# Altium PCB Board.PcbDoc
Units mil, origin at the board's own origin, x right, y up, seen from the top; angles counter-clockwise.
Board outline 2900 x 1175 mil, 4 copper layers (Top GND, Sig/3V3, Sig/5V, Bottom GND), stack 61.811 mil thick; 28 components, 19 nets, 228 pads, 85 vias.
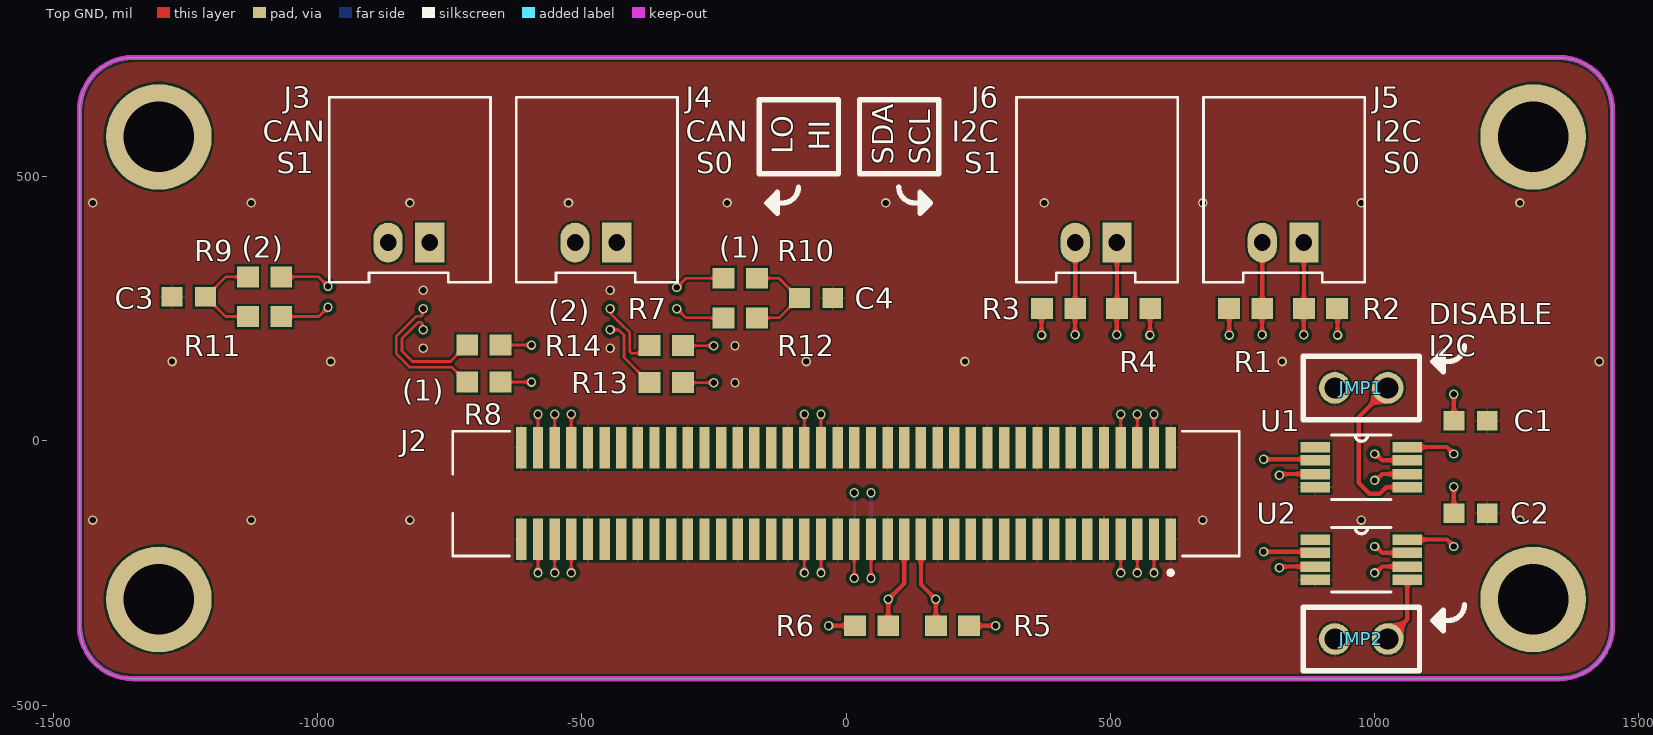
[diagram p0: Top GND view]
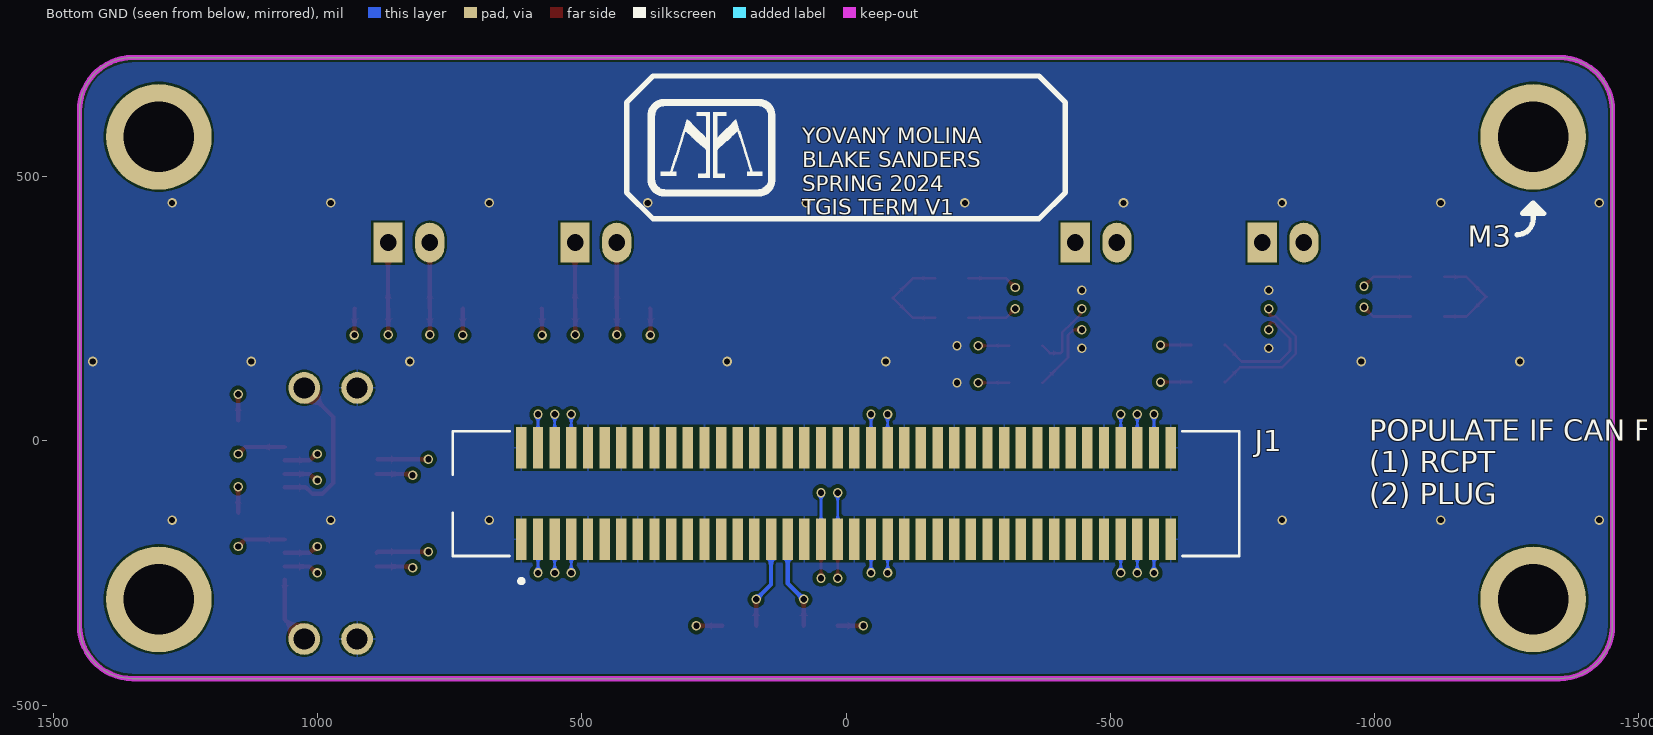
[diagram p1: Bottom GND view, seen from below]
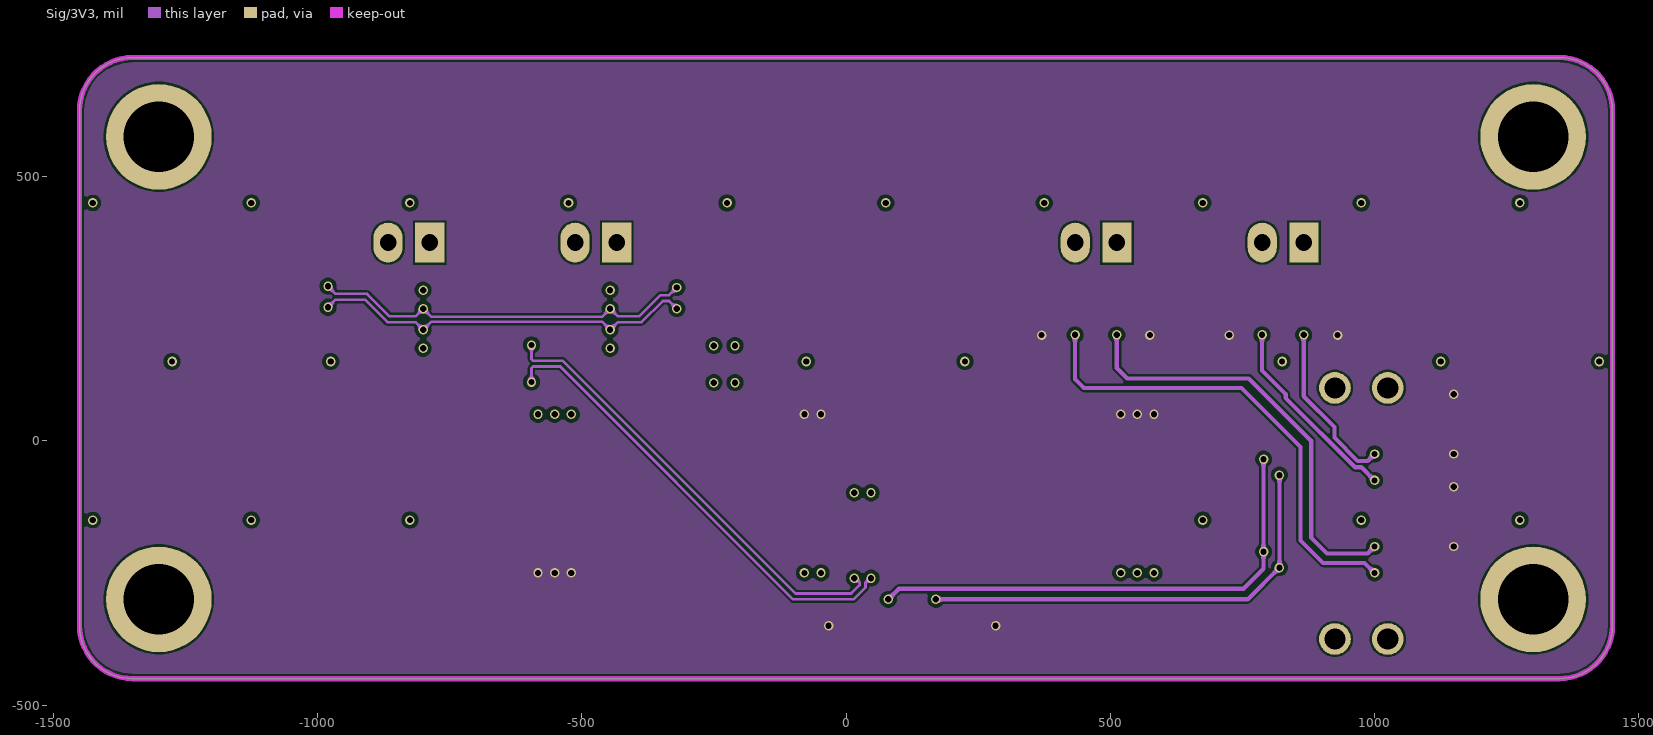
[diagram p2: Sig/3V3]
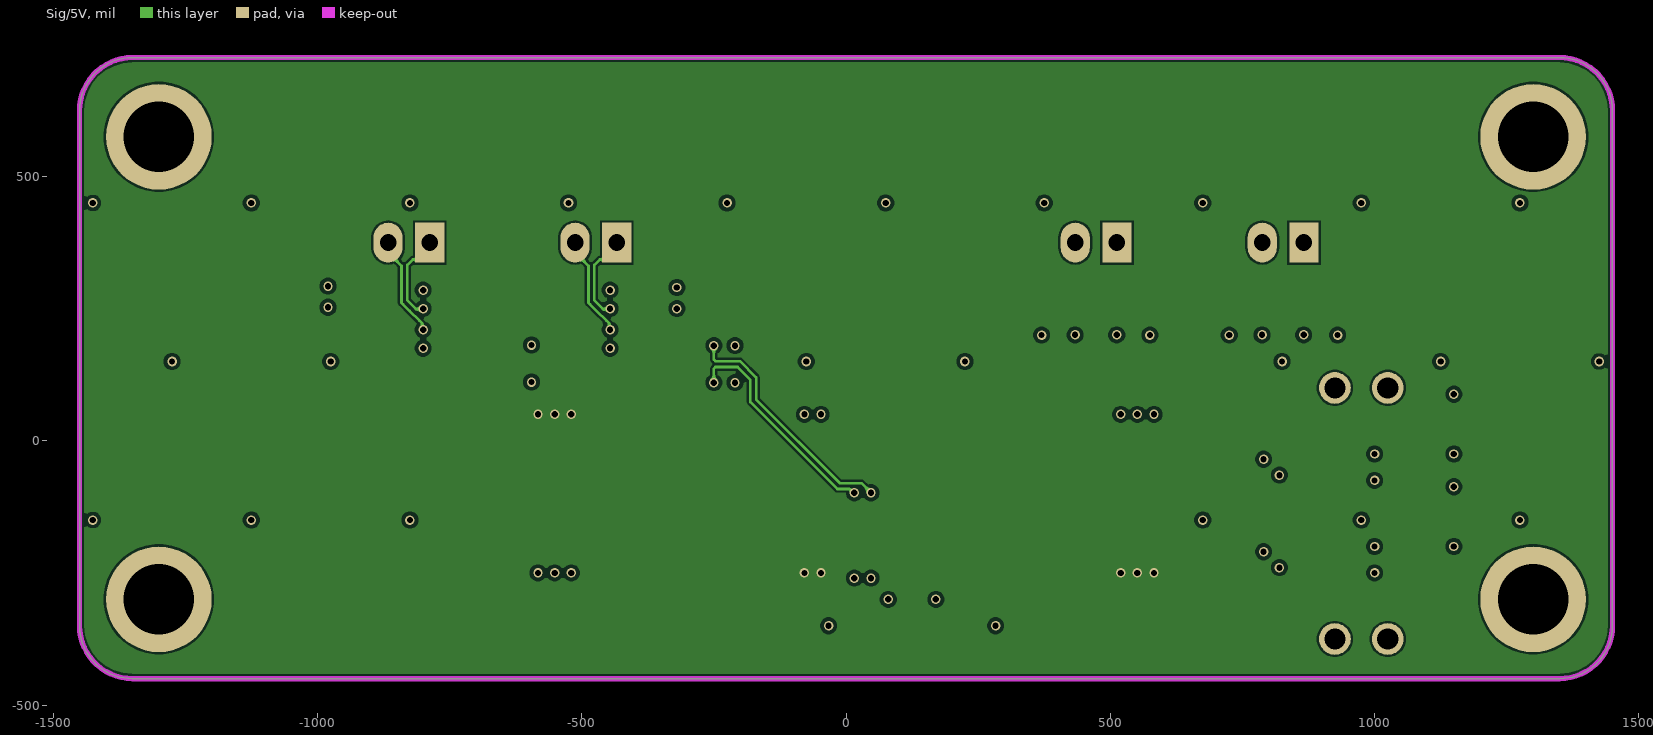
[diagram p3: Sig/5V]

## Layer stack, top to bottom
Top Mask: solder mask 0.5906, Solder Resist, Dk 3.8
Top GND: signal copper 1.378
Dielectric 1: prepreg 7.874, 7628, Dk 4.6
Sig/3V3: signal copper 0.689
Core: core 41.9291, FR-4, Dk 4.5
Sig/5V: signal copper 0.689
Dielectric 2: prepreg 7.874, 7628, Dk 4.6
Bottom GND: signal copper 1.378
Bottom Mask: solder mask 0.5906, Solder Resist, Dk 3.8

## Board outline
-1450,-350 -1450,625 cw(c-1350,625) -1350,725 1350,725 cw(c1350,625) 1450,625 1450,-350 cw(c1350,-350) 1350,-450 -1350,-450 cw(c-1350,-350)

## Design rules (kind name [scope] priority, off if disabled: settings)
BoardOutlineClearance [All] p1: gap=7.87 ignorepadtopadclearanceinfootprint=FALSE
Clearance [All] p1: gap=4 ignorepadtopadclearanceinfootprint=FALSE except(5: Arc-Via Track-Via SMDPad-Via THPad-Via Via-Via Via-Fill Via-Poly Via-Region Via-Text; 9.84: Arc-Hole Track-Hole SMDPad-Hole THPad-Hole Via-Hole Fill-Hole Poly-Hole Region-Hole Text-Hole)
ComponentClearance [All] p1: gap=4 collisioncheckmode=3 verticalgap=4 showdistances=TRUE
DiffPairsRouting "Schematic Differential Pairs Routing_4" [InNetClass('CAN0_RCPT')] p1: maxlimit=6 minlimit=6 mostfreqgap=6 toplayer_minwidth=5 toplayer_maxwidth=10 toplayer_prefwidth=8 midlayer1_minwidth=5 midlayer1_maxwidth=10 midlayer1_prefwidth=8 midlayer2_minwidth=5 midlayer2_maxwidth=10 midlayer2_prefwidth=8 bottomlayer_minwidth=5 bottomlayer_maxwidth=10 bottomlayer_prefwidth=8 maxuncoupledlength=5
DiffPairsRouting "Schematic Differential Pairs Routing_3" [InNetClass('CAN0_PLUG')] p2: maxlimit=6 minlimit=6 mostfreqgap=6 toplayer_minwidth=5 toplayer_maxwidth=10 toplayer_prefwidth=8 midlayer1_minwidth=5 midlayer1_maxwidth=10 midlayer1_prefwidth=8 midlayer2_minwidth=5 midlayer2_maxwidth=10 midlayer2_prefwidth=8 bottomlayer_minwidth=5 bottomlayer_maxwidth=10 bottomlayer_prefwidth=8 maxuncoupledlength=5
DiffPairsRouting "Schematic Differential Pairs Routing" [InNetClass('CAN0')] p3: maxlimit=6 minlimit=6 mostfreqgap=6 toplayer_minwidth=5 toplayer_maxwidth=10 toplayer_prefwidth=8 midlayer1_minwidth=5 midlayer1_maxwidth=10 midlayer1_prefwidth=8 midlayer2_minwidth=5 midlayer2_maxwidth=10 midlayer2_prefwidth=8 bottomlayer_minwidth=5 bottomlayer_maxwidth=10 bottomlayer_prefwidth=8 maxuncoupledlength=5
DiffPairsRouting [All] p4: maxlimit=4 minlimit=4 mostfreqgap=4 toplayer_minwidth=4 toplayer_maxwidth=71497.94 toplayer_prefwidth=4 midlayer1_minwidth=4 midlayer1_maxwidth=71497.94 midlayer1_prefwidth=4 midlayer2_minwidth=4 midlayer2_maxwidth=71497.94 midlayer2_prefwidth=4 bottomlayer_minwidth=4 bottomlayer_maxwidth=71497.94 bottomlayer_prefwidth=4 maxuncoupledlength=500
Height [All] p1: minheight=0 maxheight=71497.94 prefheight=500
HoleSize [All] p1: absolutevalues=TRUE maxlimit=248.03 minlimit=7.87 maxpercent=80.000 minpercent=20.000
HoleToHoleClearance [All] p1: gap=9.84 allowstackedmicrovias=FALSE
MatchedLengths "Schematic Matched Net Lengths_4" [InNetClass('CAN0_PLUG')] p1: tolerance=5 checknetsindiffpair=FALSE checkdiffpairvsdiffpair=TRUE checkxsignals=TRUE checkothers=TRUE
MatchedLengths "Schematic Matched Net Lengths_3" [InNetClass('CAN0_RCPT')] p2: tolerance=5 checknetsindiffpair=FALSE checkdiffpairvsdiffpair=TRUE checkxsignals=TRUE checkothers=TRUE
MatchedLengths "Schematic Matched Net Lengths" [InNetClass('CAN0')] p3: tolerance=5 checknetsindiffpair=FALSE checkdiffpairvsdiffpair=TRUE checkxsignals=TRUE checkothers=TRUE
MinimumAnnularRing [All] p1: minimumring=3
MinimumSolderMaskSliver [All] p1: minsoldermaskwidth=0
PlaneClearance [All] p1: clearance=4
PlaneConnect PlaneConnectPowerPads [InPadClass('PowerPads')] p1: planeconnectstyle=Direct reliefexpansion=20 reliefentries=4 reliefconductorwidth=10 reliefairgap=10
PlaneConnect [All] p2: pad.planeconnectstyle=Relief pad.reliefexpansion=11.81 pad.reliefentries=4 pad.reliefconductorwidth=4 pad.reliefairgap=4 via.planeconnectstyle=Direct via.reliefexpansion=11.81 via.reliefentries=4 via.reliefconductorwidth=5 via.reliefairgap=5
PolygonConnect PolygonConnectPowerPads [All vs (InPadClass('PowerPads'))] p1: connectstyle=Direct reliefconductorwidth=10 reliefentries=4 polygonreliefangle="90 Angle" airgapwidth=10
PolygonConnect [All] p2: thpad.connectstyle=Relief thpad.reliefconductorwidth=4 thpad.reliefentries=4 thpad.polygonreliefangle="90 Angle" thpad.airgapwidth=4 smdpad.connectstyle=Relief smdpad.reliefconductorwidth=4 smdpad.reliefentries=4 smdpad.polygonreliefangle="90 Angle" smdpad.airgapwidth=4 via.connectstyle=Direct via.reliefconductorwidth=5 via.reliefentries=4 via.polygonreliefangle="90 Angle" via.airgapwidth=5
RoutingVias [All] p1: holewidth=7.87 width=17.72 viastyle="Through Hole" minholewidth=7.87 minwidth=17.72 maxholewidth=248.03 maxwidth=257.87
SilkToSilkClearance [All] p1: silktosilkclearance=0
SilkToSolderMaskClearance [IsPad] p1: minsilkscreentomaskgap=4 clearancetoexposedcopper=TRUE
SolderMaskExpansion [All] p1: expansion=2.95 istentingtop=FALSE
Width [All] p1: maxlimit=71497.94 minlimit=4 preferedwidth=4
20 further rules are at their usual default settings.

## Classes and differential pairs
net class CAN0_RCPT: CAN0_RCPT_N CAN0_RCPT_P
net class CAN0_PLUG: CAN0_PLUG_N CAN0_PLUG_P
differential pair class CAN0_LINES: CAN0 CAN0_PLUG CAN0_RCPT
net class CAN0: CAN0_N CAN0_P
differential pair CAN0_RCPT: +CAN0_RCPT_P -CAN0_RCPT_N
differential pair CAN0_PLUG: +CAN0_PLUG_P -CAN0_PLUG_N
differential pair CAN0: +CAN0_P -CAN0_N

## Components (designator, comment, footprint, x,y, rotation, side; value= is the part's Value field where it differs from the comment)
C1 "100nF" CAPC0603 1181.5,38 r180 top
C2 "100nF" CAPC0603 1181.5,-137 r180 top
C3 "4.7nF" CAPC0603 -1243.5,272.5 r180 top
C4 "4.7nF" CAPC0603 -56.5,270 r0 top
J1 "10144517-081802LF" AMPHENOL_10144517-081802LF 0,-100 r0 bottom
J2 "10144518-083802LF" AMPHENOL_10144518-083802LF 0,-100 r180 top
J3 "0353630260" MOLEX-HDR-1X2-SHERLOCK-HORZ -787.5,375 r0 top
J4 "0353630260" MOLEX-HDR-1X2-SHERLOCK-HORZ -433.76,375 r0 top
J5 "0353630260" MOLEX-HDR-1X2-SHERLOCK-HORZ 866.24,375 r0 top
J6 "0353630260" MOLEX-HDR-1X2-SHERLOCK-HORZ 512.5,375 r0 top
JMP1 "2 Pin Header" 2PinJumper 1025,100 r180 top
JMP2 "2 Pin Header" 2PinJumper 1025,-375 r180 top
R1 "DNP" RES0603 756,250 r180 top
R2 "DNP" RES0603 897.74,250 r0 top
R3 "DNP" RES0603 402.26,250 r180 top
R4 "DNP" RES0603 544,250 r0 top
R5 "DNP" RES0603 201.5,-350 r0 top
R6 "DNP" RES0603 48.5,-350 r180 top
R7 "0R" RES0603 -340,180 r0 top
R8 "0R" RES0603 -685.04,111.1 r180 top
R9 "60.4R" RES0603 -1100,310 r0 top
R10 "60.4R" RES0603 -200,307.5 r180 top
R11 "60.4R" RES0603 -1100,235 r0 top
R12 "60.4R" RES0603 -200,232.5 r180 top
R13 "0R" RES0603 -340,110 r0 top
R14 "0R" RES0603 -685.04,181.1 r180 top
U1 "PCA9515ADP" SOP65P490X110-8N 975,-50 r0 top
U2 "PCA9515ADP" SOP65P490X110-8N 975,-225 r0 top

## Footprints (in the part's own frame and the unit in brackets; to place one, negate y for a bottom-side part, rotate by r counter-clockwise, add the part's x,y. Pads: shape width x height; smd on the part's side, far side on the other; paste and mask are expansions set on the pad)
2PinJumper [mil]
  round 60 hole 40: 1(0,0) 2(100,0)
  silkscreen extent -60,-60 160,60, body extent -52,-50 152,50, height 339
AMPHENOL_10144517-081802LF [mm]
  rect 0.5x2 smd: 1(15.6,2.2) 2(15.6,-2.2) 3(14.8,2.2) 4(14.8,-2.2) 5(14,2.2) 6(14,-2.2) 7(13.2,2.2) 8(13.2,-2.2) 9(12.4,2.2) 10(12.4,-2.2) 11(11.6,2.2) 12(11.6,-2.2) 13(10.8,2.2) 14(10.8,-2.2) 15(10,2.2) 16(10,-2.2) 17(9.2,2.2) 18(9.2,-2.2) 19(8.4,2.2) 20(8.4,-2.2) 21(7.6,2.2) 22(7.6,-2.2) 23(6.8,2.2) 24(6.8,-2.2) 25(6,2.2) 26(6,-2.2) 27(5.2,2.2) 28(5.2,-2.2) 29(4.4,2.2) 30(4.4,-2.2) 31(3.6,2.2) 32(3.6,-2.2) 33(2.8,2.2) 34(2.8,-2.2) 35(2,2.2) 36(2,-2.2) 37(1.2,2.2) 38(1.2,-2.2) 39(0.4,2.2) 40(0.4,-2.2) 41(-0.4,2.2) 42(-0.4,-2.2) 43(-1.2,2.2) 44(-1.2,-2.2) 45(-2,2.2) 46(-2,-2.2) 47(-2.8,2.2) 48(-2.8,-2.2) 49(-3.6,2.2) 50(-3.6,-2.2) 51(-4.4,2.2) 52(-4.4,-2.2) 53(-5.2,2.2) 54(-5.2,-2.2) 55(-6,2.2) 56(-6,-2.2) 57(-6.8,2.2) 58(-6.8,-2.2) 59(-7.6,2.2) 60(-7.6,-2.2) 61(-8.4,2.2) 62(-8.4,-2.2) 63(-9.2,2.2) 64(-9.2,-2.2) 65(-10,2.2) 66(-10,-2.2) 67(-10.8,2.2) 68(-10.8,-2.2) 69(-11.6,2.2) 70(-11.6,-2.2) 71(-12.4,2.2) 72(-12.4,-2.2) 73(-13.2,2.2) 74(-13.2,-2.2) 75(-14,2.2) 76(-14,-2.2) 77(-14.8,2.2) 78(-14.8,-2.2) 79(-15.6,2.2) 80(-15.6,-2.2)
  silkscreen extent -18.9,-3 18.9,4.3, body extent -18.9,-3 18.9,3, height 3.66
AMPHENOL_10144518-083802LF [mm]
  rect 0.5x2 smd paste+0: 1(-15.6,2.2) 2(-15.6,-2.2) 3(-14.8,2.2) 4(-14.8,-2.2) 5(-14,2.2) 6(-14,-2.2) 7(-13.2,2.2) 8(-13.2,-2.2) 9(-12.4,2.2) 10(-12.4,-2.2) 11(-11.6,2.2) 12(-11.6,-2.2) 13(-10.8,2.2) 14(-10.8,-2.2) 15(-10,2.2) 16(-10,-2.2) 17(-9.2,2.2) 18(-9.2,-2.2) 19(-8.4,2.2) 20(-8.4,-2.2) 21(-7.6,2.2) 22(-7.6,-2.2) 23(-6.8,2.2) 24(-6.8,-2.2) 25(-6,2.2) 26(-6,-2.2) 27(-5.2,2.2) 28(-5.2,-2.2) 29(-4.4,2.2) 30(-4.4,-2.2) 31(-3.6,2.2) 32(-3.6,-2.2) 33(-2.8,2.2) 34(-2.8,-2.2) 35(-2,2.2) 36(-2,-2.2) 37(-1.2,2.2) 38(-1.2,-2.2) 39(-0.4,2.2) 40(-0.4,-2.2) 41(0.4,2.2) 42(0.4,-2.2) 43(1.2,2.2) 44(1.2,-2.2) 45(2,2.2) 46(2,-2.2) 47(2.8,2.2) 48(2.8,-2.2) 49(3.6,2.2) 50(3.6,-2.2) 51(4.4,2.2) 52(4.4,-2.2) 53(5.2,2.2) 54(5.2,-2.2) 55(6,2.2) 56(6,-2.2) 57(6.8,2.2) 58(6.8,-2.2) 59(7.6,2.2) 60(7.6,-2.2) 61(8.4,2.2) 62(8.4,-2.2) 63(9.2,2.2) 64(9.2,-2.2) 65(10,2.2) 66(10,-2.2) 67(10.8,2.2) 68(10.8,-2.2) 69(11.6,2.2) 70(11.6,-2.2) 71(12.4,2.2) 72(12.4,-2.2) 73(13.2,2.2) 74(13.2,-2.2) 75(14,2.2) 76(14,-2.2) 77(14.8,2.2) 78(14.8,-2.2) 79(15.6,2.2) 80(15.6,-2.2)
  silkscreen extent -18.9,-3 18.9,3.9, body extent -18.9,-3 18.9,3, height 6.65
CAPC0603 [mm] "Chip Capacitor, 2-Leads, Body 1.60x0.80mm, IPC Medium Density"
  rect 1x0.95 smd: 1(-0.8,0) 2(0.8,0)
  body extent -0.88,-0.48 0.87,0.48, height 0.8
MOLEX-HDR-1X2-SHERLOCK-HORZ [mm]
  rect 1.397x1.905 hole 0.8: 1(0,0)
  oval 1.397x1.905 hole 0.8: 2(-2,0)
  silkscreen extent -4.83,-1.91 2.92,6.98, body extent -4.83,-1.91 2.87,8.59, height 5.54
RES0603 [mm] "Chip Resistor, 2-Leads, Body 1.60x0.80mm, IPC Medium Density"
  rect 1.05x1 smd: 1(-0.8,0) 2(0.8,0)
  body extent -0.88,-0.48 0.87,0.47, height 0.8
SOP65P490X110-8N [mil]
  rect 56x20 smd: 1(-87,38) 2(-87,13) 3(-87,-13) 4(-87,-38) 5(87,-38) 6(87,-13) 7(87,13) 8(87,38)
  silkscreen extent -56,-61 56,61, body extent -96,-59 96,59, height 38

## Part data
C1 C2: library part CC0603KRX7R7BB104, "Ceramic Capacitor, Multilayer, Cera", Capacitor Type=Ceramic, Case/Package=0603, Manufacturer=Yageo, Max Operating Temperature=125°C, Min Operating Temperature=-55°C, Package Shape=Rectangular, Package Style=SMTMeter, Rated DC Voltage (URdc)=16V, Supplier Part Number 1=311-1088-1-ND, Temperature Characteristics Code=X7R, Tolerance  (fill in as +-)=10%, Category="Ceramic Capacitors", ComponentLink1Description=https://datasheet.ciiva.com:443/pdf, ComponentLink1URL=https://datasheet.ciiva.com:443/pdf, ComponentLink2Description=https://datasheet.ciiva.com/11786/0, ComponentLink2URL=https://datasheet.ciiva.com/11786/0, ComponentLink3Description=https://datasheet.ciiva.com/8033/70, ComponentLink3URL=https://datasheet.ciiva.com/8033/70, ComponentLink4Description=https://datasheet.ciiva.com/7978/14, ComponentLink4URL=https://datasheet.ciiva.com/7978/14, ComponentLink5Description=https://datasheet.ciiva.com/28450/1, ComponentLink5URL=https://datasheet.ciiva.com/28450/1, ComponentLink6Description=https://datasheet.ciiva.com/46430/1, ComponentLink6URL=https://datasheet.ciiva.com/46430/1, ComponentLink7Description=https://datasheet.ciiva.com/144/mlc, ComponentLink7URL=https://datasheet.ciiva.com/144/mlc, ComponentLink8Description=https://datasheet.ciiva.com/144/mlc, ComponentLink8URL=https://datasheet.ciiva.com/144/mlc, ComponentLink9Description=https://datasheet.ciiva.com/144/mlc, ComponentLink9URL=https://datasheet.ciiva.com/144/mlc, ComponentLink10Description=https://datasheet.ciiva.com/8033/17, ComponentLink10URL=https://datasheet.ciiva.com/8033/17, ComponentLink11Description=https://datasheet.ciiva.com/13395/u, ComponentLink11URL=https://datasheet.ciiva.com/13395/u, ComponentLink12Description=https://datasheet.ciiva.com/11464/u, ComponentLink12URL=https://datasheet.ciiva.com/11464/u, ComponentLink13Description=https://datasheet.ciiva.com/15165/g, ComponentLink13URL=https://datasheet.ciiva.com/15165/g, ComponentLink14Description=https://datasheet.ciiva.com:443/pdfs/VipMasterIC/IC/YAGO/YAGO-S-A0003557223, ComponentLink14URL=https://datasheet.ciiva.com:443/pdfs/VipMasterIC/IC/YAGO/YAGO-S-A0003557223, ComponentLink15Description=https://datasheet.ciiva.com/11786/0900766b80d84f1d-11786077.pdf?src-supplie, ComponentLink15URL=https://datasheet.ciiva.com/11786/0900766b80d84f1d-11786077.pdf?src-supplie, ComponentLink16Description=https://datasheet.ciiva.com/8033/70765-8033799.pdf?src-supplier=Element14, ComponentLink16URL=https://datasheet.ciiva.com/8033/70765-8033799.pdf?src-supplier=Element14, ComponentLink17Description=https://datasheet.ciiva.com/7978/1489800-7978141.pdf?src-supplier=Element14, ComponentLink17URL=https://datasheet.ciiva.com/7978/1489800-7978141.pdf?src-supplier=Element14, ComponentLink18URL=https://datasheet.ciiva.com/28450/1489800-28450552.pdf?src-supplier=Element, Dielectric Material=Ceramic, Height=0.8mm, JESD-609 Code=e3, Length=1.6mm, Manufacturer Part Number=CC0603KRX7R7BB104, Mounting Technology="Surface Mount", Multilayer=Yes, Packaging="Tape and Reel", Part Number=CC0603KRX7R7BB104, Pins=2, Pricing 1="1=0.1, 10=0.042, 50=0.0238, 100=0.0", Reach SVHC Compliant=Yes, RoHS=Yes, RoHS Compliant=Yes, Stock 1=11347706, Supplier 1=Digikey, Terminal Finish=Nickel, Termination=Wraparound, Tolerance (fill in as +-)=10%, Width=0.8mm
C3 C4: library part CC0603JPX7R9BB472, "Ceramic Capacitor, Multilayer, Cera", Capacitor Type=Ceramic, Case/Package=0603, Manufacturer=Yageo, Max Operating Temperature=125°C, Min Operating Temperature=-55°C, Package Shape=Rectangular, Package Style=SMTMeter, Rated DC Voltage (URdc)=50V, Supplier Part Number 1=13-CC0603JPX7R9BB472CT-ND, Temperature Characteristics Code=X7R, Tolerance  (fill in as +-)=5%, Category="Ceramic Capacitors", ComponentLink1Description=https://datasheet.ciiva.com:443/pdf, ComponentLink1URL=https://datasheet.ciiva.com:443/pdf, ComponentLink2Description=http://www.mouser.com/ds/2/447/Yage, ComponentLink2URL=http://www.mouser.com/ds/2/447/Yage, Dielectric Material=Ceramic, Height=0.8mm, JESD-609 Code=e3, Length=1.6mm, Manufacturer Part Number=CC0603JPX7R9BB472, Mounting Technology="Surface Mount", Multilayer=Yes, Packaging="Tape and Reel", Part Number=CC0603JPX7R9BB472, Pins=2, Pricing 1="1=0.1, 10=0.069, 50=0.0398, 100=0.0", Reach SVHC Compliant=Yes, RoHS=Yes, RoHS Compliant=Yes, Stock 1=59880, Supplier 1=Digikey, Terminal Finish=Nickel, Termination=Wraparound, Tolerance (fill in as +-)=5%, Width=0.8mm
J1: "CONN RCPT 1 80POS SMD GOLD", Supplier Part Number 1=609-5437-1-ND, Supplier 1=Digikey, System=Connector
J2: "CONN PLUG 3 80POS SMD GOLD", Supplier Part Number 1=609-5455-1-ND, Supplier 1=Digikey, System=Connector
J3 J4 J5 J6: library part SHERLOCK-1x2-RA, "Header, Molex, 2mm Pitch Sherlock Header, Single Row, Horizontal, 2 Circuits, Length 3.3mm,  0353630260", Manufacturer="Molex Inc", Supplier Part Number 1=WM18931-ND, Manufacturer Part Number=0353630260, Supplier 1=Digi-Key
JMP1 JMP2: library part Jumper_2Pin, "2 Position Jumper"
R1 R2 R3 R4 R5 R6: library part Resistor_DNP, "(DO NOT PLACE) Resistor"
R7 R8 R13 R14: library part RC0603FR-070RL, "Fixed Resistor, Metal Glaze/thick F", Case/Package=0603, Max Operating Temperature=155°C, Min Operating Temperature=-55°C, Package Shape=Rectangular, Power=100mW, Rated Temperature=70°C, Resistor Type="FIXED RESISTOR", Category="Chip SMD Resistors", ComponentLink1Description=https://datasheet.ciiva.com:443/pdf, ComponentLink1URL=https://datasheet.ciiva.com:443/pdf, ComponentLink2Description=https://datasheet.ciiva.com/11808/0, ComponentLink2URL=https://datasheet.ciiva.com/11808/0, ComponentLink3Description=https://datasheet.ciiva.com/5684/44, ComponentLink3URL=https://datasheet.ciiva.com/5684/44, ComponentLink4Description=https://datasheet.ciiva.com/7983/44, ComponentLink4URL=https://datasheet.ciiva.com/7983/44, ComponentLink5Description=https://datasheet.ciiva.com/22643/1, ComponentLink5URL=https://datasheet.ciiva.com/22643/1, ComponentLink6Description=https://datasheet.ciiva.com/46382/4, ComponentLink6URL=https://datasheet.ciiva.com/46382/4, ComponentLink7Description=https://datasheet.ciiva.com/29721/p, ComponentLink7URL=https://datasheet.ciiva.com/29721/p, ComponentLink8Description=https://datasheet.ciiva.com/29721/p, ComponentLink8URL=https://datasheet.ciiva.com/29721/p, ComponentLink9Description=https://datasheet.ciiva.com/5558/rc, ComponentLink9URL=https://datasheet.ciiva.com/5558/rc, JESD-609 Code=e3, Mounting Technology="Surface Mount", Packaging="Tape and Reel", Part Number=RC0603FR-070RL, Pins=2, Pricing 1="5000=0.0015, 50000=0.0014, 125000=0", Reach SVHC Compliant=Yes, RoHS Compliant=Yes, Stock 1=2895000, Technology="METAL GLAZE/THICK FILM", Terminal Finish=Nickel, Termination=Wraparound
R9 R10 R11 R12: library part RC0603FR-0760R4L, "Fixed Resistor, Metal Glaze/thick F", Case/Package=0603, Manufacturer=Yageo, Max Operating Temperature=155°C, Min Operating Temperature=-55°C, Package Height=0.45mm, Package Length=1.6mm, Package Shape=Rectangular, Package Style=SMTMeter, Package Width=0.8mm, Power=100mW, Rated Temperature=70°C, Resistor Type="FIXED RESISTOR", Supplier Part Number 1=311-60.4HRCT-ND, Temperature Coefficient=100ppm/°C, Tolerance=1%, Working Voltage=75V, Additional Feature="LASER TRIMMABLE", Category="Chip SMD Resistors", ComponentLink1Description=https://datasheet.ciiva.com:443/pdf, ComponentLink1URL=https://datasheet.ciiva.com:443/pdf, ComponentLink2Description=https://datasheet.ciiva.com/12558/r, ComponentLink2URL=https://datasheet.ciiva.com/12558/r, Construction=Chip, JESD-609 Code=e3, Manufacturer Part Number=RC0603FR-0760R4L, Mounting Technology="Surface Mount", Packaging="Tape and Reel", Part Number=RC0603FR-0760R4L, Pins=2, Pricing 1="1=0.1, 10=0.019, 50=0.0112, 100=0.0", Reach SVHC Compliant=Yes, RoHS=Yes, RoHS Compliant=Yes, Stock 1=181136, Supplier 1=Digikey, Technology="METAL GLAZE/THICK FILM", Terminal Finish=Nickel, Termination=Wraparound
U1 U2: "IC REDRIVER I2C 2CH 8TSSOP", Supplier Part Number 1=568-1032-1-ND, Supplier 1=Digikey

## Free pads (board coordinates)
  round 200 hole 133.86: M3(-1300,-300) M3(-1300,575) M3(1300,-300) M3(1300,575)

## Via types
v1: diameter 17.81, hole 11.81, Top GND to Bottom GND, tented top, 62 vias
v2: diameter 18, hole 12, Top GND to Bottom GND, 23 vias

## Nets (pads, with @x,y where several pads share a name; then routed paths per layer and width w, separated by ;. In a path a pad name is that pad's centre, name@x,y a point inside that pad or via, vN(x,y) a via of type N, cw(c..) or ccw(c..) an arc to the next point about the centre after c; other vN are vias at no path point)
+3V3: C1.2 C2.2 J1.4 J1.6 J1.8 J1.44 J1.46 J1.73 J1.75 J1.77 J2.4 J2.6 J2.8 J2.44 J2.46 J2.73 J2.75 J2.77 R1.2 R2.2 R3.2 R4.2 R5.2 R6.2 U1.8 U2.8 | length 1598.9
  Top GND w5: v1(-582.68,-250) J2.77 ; v1(-551.18,-250) J2.75 ; v1(-519.68,-250) J2.73 ; J2.46 v1(-78.74,50) ; J2.44 v1(-47.24,50) ; J2.8 v1(519.69,50) ; J2.6 v1(551.18,50) ; J2.4 v1(582.68,50)
  Top GND w8: v1(-32.99,-350) R6.2@16.24,-350 ; R5.2@233.76,-350 v1(282.99,-350) ; v1(370,200) 370,249.23 R3.2 ; v1(575,200) 575,249.51 R4.2 ; R1.2 725,249.51 v1(725,200) ; R2.2 930,249.23 v1(930,200) ; U2.8 1137,-187 v1(1150,-200) ; U1.8 1137,-12 v1(1150,-25) ; C2.2@1150,-136.23 v1(1150,-87) ; C1.2@1150,38.77 v1(1150,88)
  Bottom GND w5: v1(-582.68,-250) J1.77 ; v1(-551.18,-250) J1.75 ; v1(-519.68,-250) J1.73 ; J1.46 v1(-78.74,50) ; J1.44 v1(-47.24,50) ; J1.8 v1(519.69,50) ; J1.6 v1(551.18,50) ; J1.4 v1(582.68,50)
+5V: J1.3 J1.5 J1.7 J1.43 J1.45 J1.74 J1.76 J1.78 J2.3 J2.5 J2.7 J2.43 J2.45 J2.74 J2.76 J2.78 | length 1014.2
  Top GND w5: J2.78 v1(-582.68,50) ; J2.76 v1(-551.18,50) ; J2.74 v1(-519.68,50) ; v1(-78.74,-250) J2.45 ; v1(-47.24,-250) J2.43 ; v1(519.69,-250) J2.7 ; v1(551.18,-250) J2.5 ; v1(582.68,-250) J2.3
  Bottom GND w5: J1.78 v1(-582.68,50) ; J1.76 v1(-551.18,50) ; J1.74 v1(-519.68,50) ; v1(-78.74,-250) J1.45 ; v1(-47.24,-250) J1.43 ; v1(519.69,-250) J1.7 ; v1(551.18,-250) J1.5 ; v1(582.68,-250) J1.3
CAN0_N: J3.2 J4.2 R11.2 R12.2 R13.1 R14.2 | length 1681.1
  Top GND w5: R11.2 -997.5,235 v1(-980,252.5) ; v1(-800,210) -801.56,211.56 -801.56,221.57 -804.49,224.5 -808.63,224.5 -840,193.13 -840,170 -820,150 -748.62,150 -717.52,181.1 R14.2 ; v1(-446.26,210) -430,210 -420,200 -420,157.52 -390.32,127.84 -372.48,110 R13.1 ; v1(-320,250) -302.5,232.5 R12.2
  Sig/3V3 w5: v1(-980,252.5) -965.5,267 -910.31,267 -867.81,224.5 -814.5,224.5 v1(-800,210) -784.5,225.5 -461.76,225.5 v1(-446.26,210) -431.76,224.5 -386.63,224.5 -346.63,264.5 -334.5,264.5 v1(-320,250)
  Sig/5V w5: J3.2 -866.24,356.24 -841,331 -841,261.01 -837.78,257.79 -825.93,245.93 -807.27,227.28 -801.56,221.57 -801.56,211.56 v1(-800,210) ; J4.2 -512.5,356.24 -487.26,331 -487.26,261.01 -484.04,257.79 -472.19,245.93 -453.53,227.28 -447.82,221.57 -447.82,211.56 v1(-446.26,210)
CAN0_P: J3.1 J4.1 R7.1 R8.2 R9.2 R10.2 | length 1668.7
  Top GND w5: R9.2 -997.5,310 v1(-980,292.5) ; v1(-800,250) -801.56,248.44 -801.56,238.43 -804.49,235.5 -813.19,235.5 -851,197.69 -851,165.44 -824.56,139 -745.42,139 -717.52,111.1 R8.2 ; v1(-446.26,250) -443.93,247.67 -443.93,239.2 -426.6,221.88 -426.32,221.88 -409,204.56 -409,168.75 -406.07,165.82 -385.68,165.82 R7.1 ; v1(-320,290) -302.5,307.5 R10.2
  Sig/3V3 w5: v1(-980,292.5) -965.5,278 -905.75,278 -863.25,235.5 -814.5,235.5 v1(-800,250) -784.5,234.5 -461.76,234.5 v1(-446.26,250) -431.76,235.5 -391.19,235.5 -351.19,275.5 -334.5,275.5 v1(-320,290)
  Sig/5V w5: v1(-800,250) -801.01,248.99 -813.43,248.99 -830,265.56 -830,332.5 -819.57,342.93 -812.5,342.93 -787.5,367.93 J3.1 ; v1(-446.26,250) -447.27,248.99 -459.69,248.99 -476.26,265.56 -476.26,332.5 -465.83,342.93 -458.76,342.93 -433.76,367.93 J4.1
CAN0_PLUG_N: J1.39 R13.2 | length 563.4
  Top GND w5: R13.2 v1(-250,110)
  Sig/5V w5: v1(-250,110) -250,136.57 -247.07,139.5 -205.06,139.5 -181,115.44 -181,73.43 -16.39,-91.18 6.46,-91.18 13.71,-98.43 v1(15.75,-98.43)
  Bottom GND w5: J1.39 v1(15.75,-98.43)
CAN0_PLUG_P: J1.37 R7.2 | length 599.4
  Top GND w5: R7.2 v1(-250,180)
  Sig/5V w5: v1(-250,180) -250,153.43 -247.07,150.5 -200.5,150.5 -170,120 -170,77.99 -11.84,-80.18 29,-80.18 v1(47.24,-98.43)
  Bottom GND w5: J1.37 v1(47.24,-98.43)
CAN0_RCPT_N: J2.39 R14.1 | length 987.8
  Top GND w5: R14.1 v1(-595.04,181.1) ; v1(15.75,-259.84) J2.39
  Sig/3V3 w5: v1(-595.04,181.1) -595.04,154.53 -592.11,151.6 -536.05,151.6 -529.6,145.16 -95.44,-289 9.72,-289 26,-272.73 26,-268.59 17.25,-259.84 v1(15.75,-259.84)
CAN0_RCPT_P: J2.37 R8.1 | length 1006
  Top GND w5: R8.1 v1(-595.04,111.1) ; v1(47.24,-259.84) J2.37
  Sig/3V3 w5: v1(-595.04,111.1) -595.04,137.67 -592.11,140.6 -540.6,140.6 -100,-300 14.28,-300 37,-277.29 37,-268.59 45.74,-259.84 v1(47.24,-259.84)
GND: C1.1 C2.1 C3.2 C4.2 J1.1 J1.2 J1.9 J1.10 J1.13 J1.14 J1.15 J1.17 J1.18 J1.23 J1.24 J1.29 J1.30 J1.35 J1.36 J1.41 J1.42 J1.47 J1.48 J1.53 J1.54 J1.59 J1.60 J1.65 J1.66 J1.71 J1.72 J1.79 J1.80 J2.1 J2.2 J2.9 J2.10 J2.13 J2.14 J2.17 J2.18 J2.23 J2.24 J2.29 J2.30 J2.35 J2.36 J2.41 J2.42 J2.47 J2.48 J2.53 J2.54 J2.59 J2.60 J2.65 J2.66 J2.71 J2.72 J2.79 J2.80 JMP1.2 JMP2.2 U1.4 U2.4
  other v1: -210,110 -800,175 -446.26,175 -210,180 -800,285 -446.26,285
  other v2: -1425,-150 -1125,-150 -825,-150 675,-150 975,-150 1275,-150 -1275,150 -975,150 -75,150 225,150 825,150 1125,150 1425,150 -1425,450 -1125,450 -825,450 -525,450 -225,450 75,450 375,450 675,450 975,450 1275,450
I2C0_S0_SCL: J5.1 R2.1 U1.7 | length 559.3
  Top GND w8: v1(865.86,200.38) R2.1@865.86,249.62 ; R2.1 J5.1 ; v1(1000,-25) 1002.63,-25 1014.63,-37 U1.7
  Sig/3V3 w8: v1(865.86,200.38) 865.86,84.14 924,26 924,6 968,-38 987,-38 v1(1000,-25)
I2C0_S0_SDA: J5.2 R1.1 U1.6 | length 611.8
  Top GND w8: v1(787.12,200.38) R1.1@787.12,249.62 ; R1.1 J5.2 ; v1(1000,-75) 1002.63,-75 1014.63,-63 U1.6
  Sig/3V3 w8: v1(787.12,200.38) 787.12,132.88 831.78,88.22 831.78,81.25 963.03,-50 975,-50 v1(1000,-75)
I2C0_S1_SCL: J6.1 R4.1 U2.7 | length 1049.5
  Top GND w8: v1(512.12,200.38) R4.1@512.12,249.62 ; R4.1 J6.1 ; v1(1000,-200) 1002.63,-200 1014.63,-212 U2.7
  Sig/3V3 w8: v1(512.12,200.38) 512.12,137.88 532,118 762,118 880,0 880,-183 910,-213 987,-213 v1(1000,-200)
I2C0_S1_SDA: J6.2 R3.1 U2.6 | length 1146.8
  Top GND w8: v1(433.38,200.38) R3.1@433.38,249.62 ; R3.1 J6.2 ; v1(1000,-250) 1002.63,-250 1014.63,-238 U2.6
  Sig/3V3 w8: v1(433.38,200.38) 433.38,116.62 450,100 748,100 860,-12 860,-188.46 902.54,-231 981,-231 v1(1000,-250)
I2C0_SCL: J1.33 J2.33 R6.1 U1.2 U2.2 | length 1437.7
  Top GND w8: R6.1 v1(80,-300) 110.24,-269.76 J2.33 ; v1(790,-210) 886,-210 U2.2 ; v1(790,-35) U1.2@886,-35
  Sig/3V3 w8: v1(80,-300) 100,-280 752,-280 790,-242 v1(790,-210) v1(790,-35)
  Bottom GND w8: v1(80,-300) 110.24,-269.76 J1.33
I2C0_SDA: J1.31 J2.31 R5.1 U1.3 U2.3 | length 1284.9
  Top GND w8: J2.31 141.73,-271.73 v1(170,-300) R5.1 ; v1(820,-240) 822,-238 U2.3 ; v1@822,-63 U1.3
  Sig/3V3 w8: v1(170,-300) 760,-300 v1(820,-240) v1(820,-65)
  Bottom GND w8: J1.31 141.73,-271.73 v1(170,-300)
NetC3_1: C3.1 R9.1 R11.1 | length 191.1
  Top GND w5: C3.1 C3.1@-1211.02,272.5 ; R11.1 -1173.52,235 C3.1@-1211.02,272.5 ; R9.1 -1173.52,310 C3.1@-1211.02,272.5
NetC4_1: C4.1 R10.1 R12.1 | length 191.1
  Top GND w5: R12.1 -126.48,232.5 C4.1@-88.98,270 ; R10.1 -126.48,307.5 C4.1@-88.98,270 ; C4.1 C4.1@-88.98,270
NetJMP1_1: JMP1.1 U1.5 | length 308
  Top GND w8: JMP1.1 970,45 970,-80 990,-100 1010,-100 1022,-88 U1.5
NetJMP2_1: JMP2.1 U2.5 | length 127.3
  Top GND w8: JMP2.1 1062,-338 U2.5
pads on no net: J1.11 J1.12 J1.16 J1.19 J1.20 J1.21 J1.22 J1.25 J1.26 J1.27 J1.28 J1.32 J1.34 J1.38 J1.40 J1.49 J1.50 J1.51 J1.52 J1.55 J1.56 J1.57 J1.58 J1.61 J1.62 J1.63 J1.64 J1.67 J1.68 J1.69 J1.70 J2.11 J2.12 J2.15 J2.16 J2.19 J2.20 J2.21 J2.22 J2.25 J2.26 J2.27 J2.28 J2.32 J2.34 J2.38 J2.40 J2.49 J2.50 J2.51 J2.52 J2.55 J2.56 J2.57 J2.58 J2.61 J2.62 J2.63 J2.64 J2.67 J2.68 J2.69 J2.70 U1.1 U2.1

## Polygon pours and split planes (outlines as drawn)
GND on Bottom GND "GND_L04_P003" (solid, remove dead copper, pour order 3): -1450,-350 -1450,625 cw(c-1350,625) -1350,725 1350,725 cw(c1350,625) 1450,625 1450,-350 cw(c1350,-350) 1350,-450 -1350,-450 cw(c-1350,-350)
+5V on Sig/5V "+5V_L03_P002" (solid, remove dead copper, pour order 2): -1450,-350 -1450,625 cw(c-1350,625) -1350,725 1350,725 cw(c1350,625) 1450,625 1450,-350 cw(c1350,-350) 1350,-450 -1350,-450 cw(c-1350,-350)
+3V3 on Sig/3V3 "+3V3_L02_P001" (solid, remove dead copper, pour order 1): -1450,-350 -1450,625 cw(c-1350,625) -1350,725 1350,725 cw(c1350,625) 1450,625 1450,-350 cw(c1350,-350) 1350,-450 -1350,-450 cw(c-1350,-350)
GND on Top GND "GND_L01_P000" (solid, remove dead copper, pour order 0): -1450,-350 -1450,625 cw(c-1350,625) -1350,725 1350,725 cw(c1350,625) 1450,625 1450,-350 cw(c1350,-350) 1350,-450 -1350,-450 cw(c-1350,-350)

## Keep-outs
Keep-Out Layer:
  the board outline again, w10

## Silkscreen, mask and mechanical layers (free items; w line width, h text height)
Top Overlay:
  region: 160,450 140,470 140,430
  region: -150,450 -130,470 -130,430
  region: 1110,-340 1130,-320 1130,-360
  region: 1110,150 1130,170 1130,130
  lines w10: -130,450 -120,450 ccw(c-120,480) -90,480 ; 100,480 ccw(c130,480) 130,450 140,450 ; 1130,-340 1140,-340 ccw(c1140,-310) 1170,-310 ; 1130,150 1140,150 ccw(c1140,180) 1170,180 ; -164.32,505.14 -14.32,505.14 -14.32,645.14 -164.32,645.14 -164.32,505.14 ; -150,450 -130,430 -130,470 -150,450 ; 25.68,505.14 175.68,505.14 175.68,645.14 25.68,645.14 25.68,505.14 ; 140,430 160,450 140,470 140,430 ; 1110,-340 1130,-320 1130,-360 1110,-340 ; 1110,150 1130,170 1130,130 1110,150
  text "CAN" at -1103.32,566 h40
  text "CAN" at -303.32,566 h40
  text "I2C" at 200.02,566 h40
  text "I2C" at 1000.02,566 h40
  text "HI" at -30.32,548.48 h40 r90
  text "LO" at -100.32,541.82 h40 r90
  text "SDA" at 89.68,521.83 h40 r90
  text "SCL" at 159.68,521.83 h40 r90
  text "S1" at -1076.66,506 h40
  text "S0" at -283.32,506 h40
  text "S1" at 223.34,506 h40
  text "S0" at 1016.68,506 h40
  text "(2)" at -1143.32,346 h40
  text "(1)" at -239.99,346 h40
  text "(2)" at -563.32,226 h40
  text "DISABLE  / I2C" at 1102.02,160 h40
  text "(1)" at -839.99,76 h40
Bottom Overlay:
  drawing of 17 lines, arcs and shapes, not listed
  text "YOVANY MOLINA / BLAKE SANDERS / SPRING 2024 / TGIS TERM V1" at 82.46,427.43 h30
  text "M3" at -1176.67,366.67 h40
  text "POPULATE IF CAN FROM / (1) RCPT / (2) PLUG" at -990,-120 h40
Mechanical 1:
  lines w10: -1450,-300 -1300,-300 -1300,-450 ; -1450,250 1450,250 ; -1450,575 -1300,575 ; -1300,725 -1300,575 ; -787.5,375 -512.5,375 ; -750,-100 750,-100 ; 0,-450 0,725 ; 512.5,375 787.5,375 ; 1300,-450 1300,-300 1450,-300 ; 1300,725 1300,575 ; 1450,575 1300,575 ; -1300,575 -650,575 0,575 1300,575
Mechanical 13:
  lines w10: -614.17,-186.61 -614.17,-13.39 ; -582.68,-186.61 -582.68,-13.39 ; -551.18,-186.61 -551.18,-13.39 ; -519.69,-186.61 -519.69,-13.39 ; -488.19,-186.61 -488.19,-13.39 ; -456.69,-186.61 -456.69,-13.39 ; -425.2,-186.61 -425.2,-13.39 ; -393.7,-186.61 -393.7,-13.39 ; -362.21,-186.61 -362.21,-13.39 ; -330.71,-186.61 -330.71,-13.39 ; -299.21,-186.61 -299.21,-13.39 ; -267.72,-186.61 -267.72,-13.39 ; -236.22,-186.61 -236.22,-13.39 ; -204.72,-186.61 -204.72,-13.39 ; -173.23,-186.61 -173.23,-13.39 ; -141.73,-186.61 -141.73,-13.39 ; -110.24,-186.61 -110.24,-13.39 ; -78.74,-186.61 -78.74,-13.39 ; -47.24,-186.61 -47.24,-13.39 ; -15.75,-186.61 -15.75,-13.39 ; 15.75,-186.61 15.75,-13.39 ; 47.24,-186.61 47.24,-13.39 ; 78.74,-186.61 78.74,-13.39 ; 110.24,-186.61 110.24,-13.39 ; 141.73,-186.61 141.73,-13.39 ; 173.23,-186.61 173.23,-13.39 ; 204.72,-186.61 204.72,-13.39 ; 236.22,-186.61 236.22,-13.39 ; 267.72,-186.61 267.72,-13.39 ; 299.21,-186.61 299.21,-13.39 ; 330.71,-186.61 330.71,-13.39 ; 362.21,-186.61 362.21,-13.39 ; 393.7,-186.61 393.7,-13.39 ; 425.2,-186.61 425.2,-13.39 ; 456.69,-186.61 456.69,-13.39 ; 488.19,-186.61 488.19,-13.39 ; 519.69,-186.61 519.69,-13.39 ; 551.18,-186.61 551.18,-13.39 ; 582.68,-186.61 582.68,-13.39 ; 614.17,-186.61 614.17,-13.39